# EAGLE board pcb_raspberry_pi (EAGLE 9.6.2)
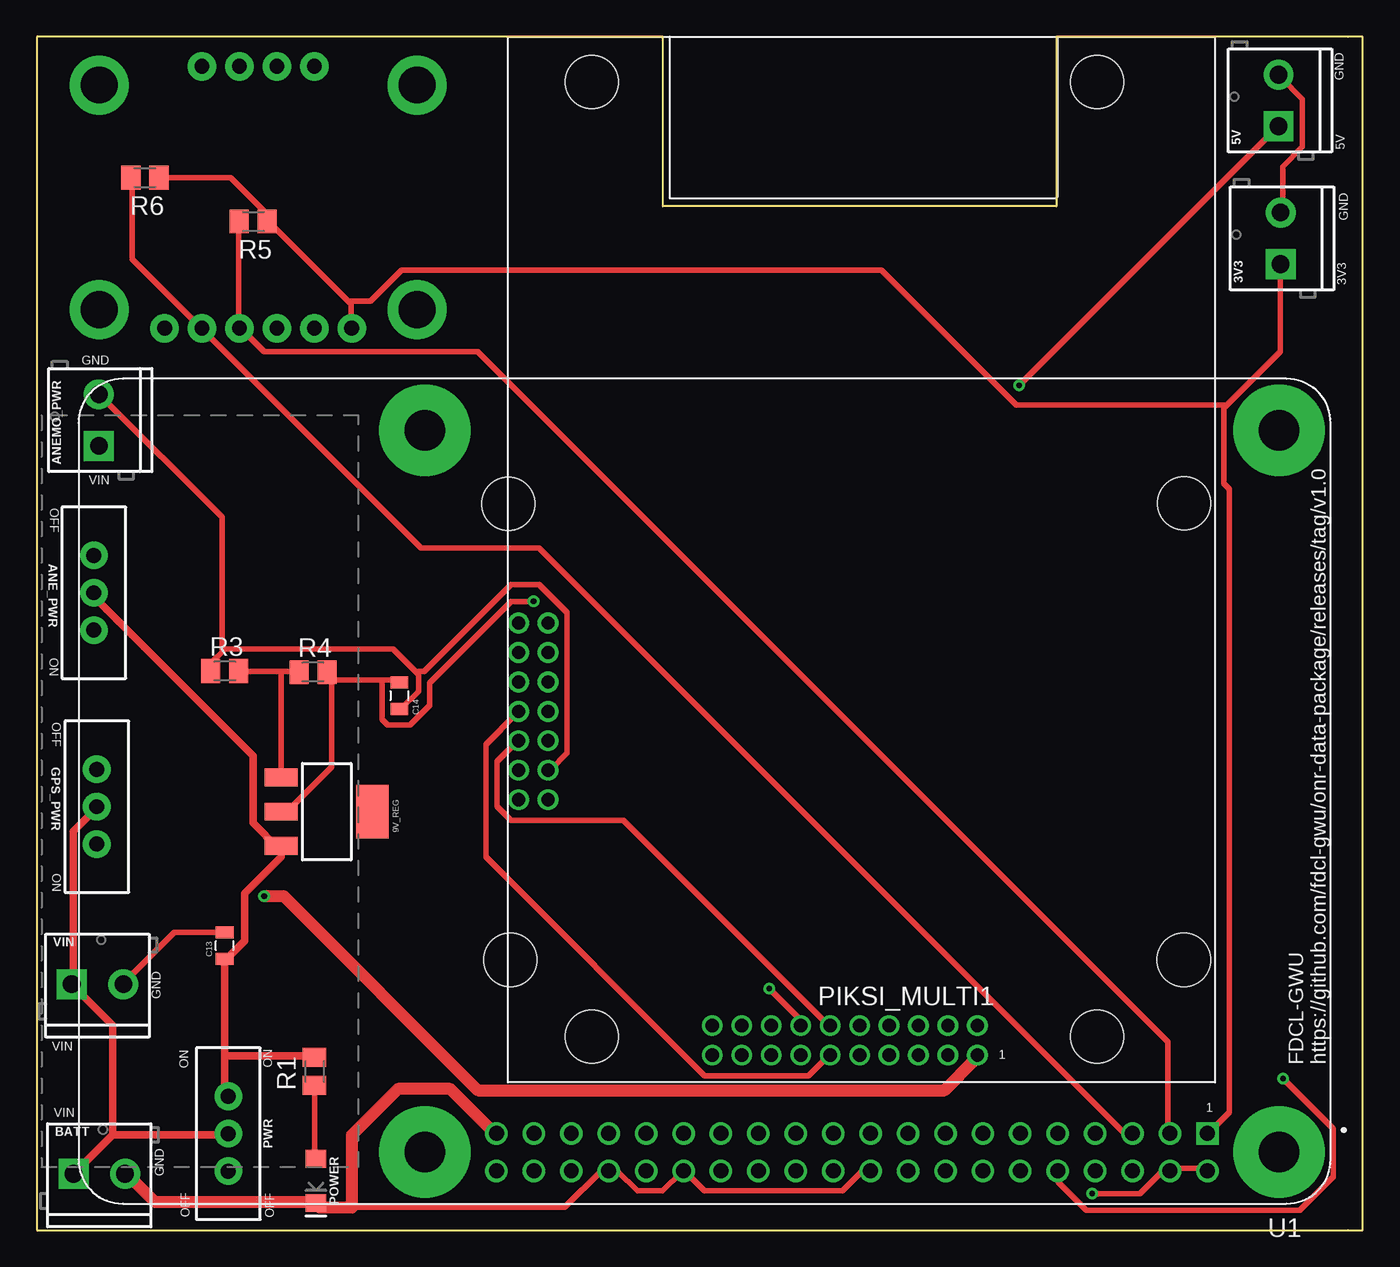
[diagram p0: board, top side]
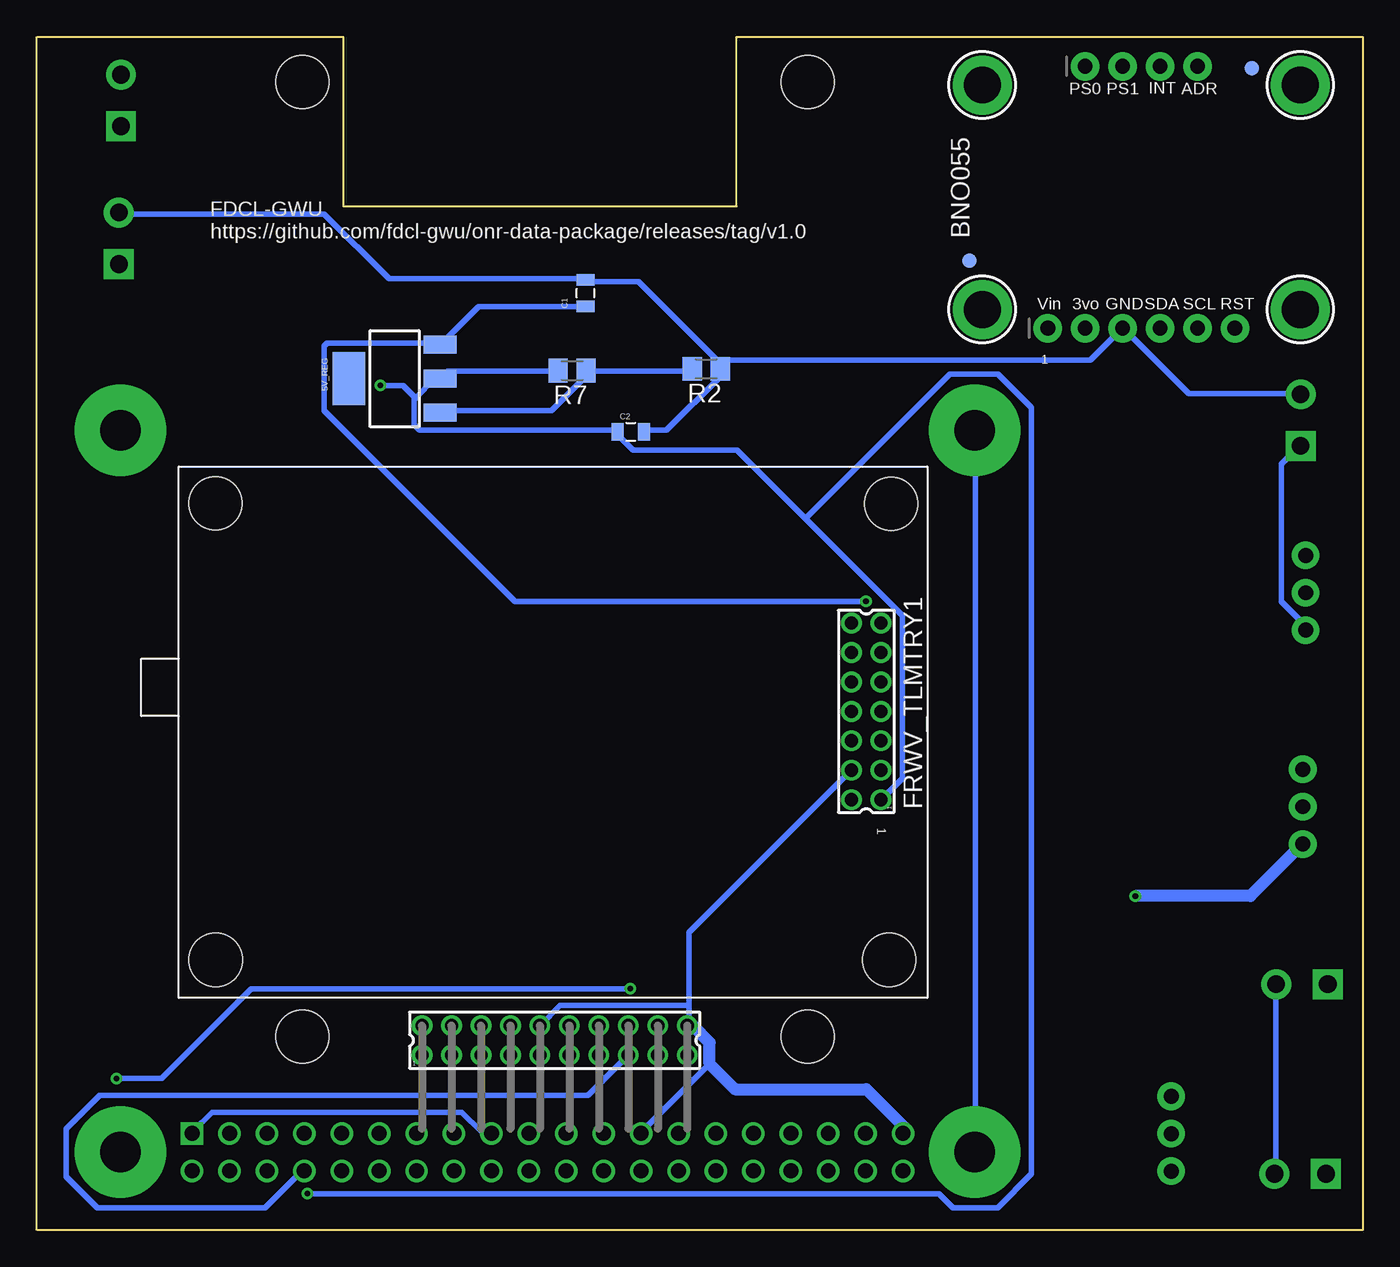
[diagram p1: board, bottom side, seen from below]

Size 90 x 81 mm. Coordinates in mm from the lower left corner, seen from the top.
Outline: 0,0 89,0 90,0 90,81 89,81 69.2,81 69.2,69.5 42.5,69.5 42.5,81 0,81 0,0
Copper layers (1*16): Top 0.035mm / dielectric 1.5mm / Bottom 0.035mm
Design rules "default": minimum track width 6mil, minimum drill 0.35mm, track to track 6mil, track to pad 6mil, pad to pad 6mil, via to via 6mil, smd to smd 6mil, copper to edge 40mil, drill to drill 6mil, minimum pad ring 10mil, minimum via ring 8mil, stop-mask expansion 4mil, vias tented up to drill 0mil, thermal gap 10mil
Net classes: 0 default: width 0.381 mm, drill 0.381 mm, clearance 0.381 mm; 1 V_IN: width 0.508 mm, drill 0.381 mm, clearance 0.381 mm
Holes 3.6 mm at 71.98,13.12 37.68,13.12 71.98,77.92 37.68,77.92 32.02,49.3 32.14,18.34 77.88,49.32 77.86,18.34

## Footprints (pad centres in the part's own frame; a part is rotated, then mirrored left to right if it is on the bottom)
SCREWTERMINAL-3.5MM-2 = drill 1.2 pad 2.032 square: 1 0,0 | drill 1.2 pad 2.032: 2 3.5,0
SOT223 = smd 1.219 x 2.235: 1 -2.311,-3.099; 2 0,-3.099; 3 2.311,-3.099 | smd 3.6 x 2.2: 4 0,3.099
SWITCH_SPDT_PTH_11.6X4.0MM = drill 1.016 pad 1.88: 1 0,2.54; 2 0,0; 3 0,-2.54
0805 = smd 0.8 x 1.2: 1 -0.9,0; 2 0.9,0
FIDUCIAL_1MM = smd 1 x 1: 1 0,0
87758-1416 = drill 0.9 pad 1.27: 1 -6,-1; 2 -6,1; 3 -4,-1; 4 -4,1; 5 -2,-1; 6 -2,1; 7 0,-1; 8 0,1; 9 2,-1; 10 2,1; 11 4,-1; 12 4,1; 13 6,-1; 14 6,1
1X06_ROUND_76 = drill 1 pad 1.93: 1 -6.35,0; 2 -3.81,0; 3 -1.27,0; 4 1.27,0; 5 3.81,0; 6 6.35,0
1X04_ROUND_76 = drill 1 pad 1.93: 1 -3.81,0; 2 -1.27,0; 3 1.27,0; 4 3.81,0
332-20 = drill 0.9 pad 1.27: 1 -9,-1; 2 -9,1; 3 -7,-1; 4 -7,1; 5 -5,-1; 6 -5,1; 7 -3,-1; 8 -3,1; 9 -1,-1; 10 -1,1; 11 1,-1; 12 1,1; 13 3,-1; 14 3,1; 15 5,-1; 16 5,1; 17 7,-1; 18 7,1; 19 9,-1; 20 9,1
LED-1206 = smd 1.2 x 1.4: A -1.5,0; C 1.5,0
M2012 = smd 1.3 x 1.6: 1 -0.95,0; 2 0.95,0
MODULE_RASPBERRY_PI_3_MODEL_B+ = drill 1.016 square: 1 -34.13,23.23 | drill 1.016: 2 -34.13,25.77; 3 -31.59,23.23; 4 -31.59,25.77; 5 -29.05,23.23; 6 -29.05,25.77; 7 -26.51,23.23; 8 -26.51,25.77; 9 -23.97,23.23; 10 -23.97,25.77; 11 -21.43,23.23; 12 -21.43,25.77; 13 -18.89,23.23; 14 -18.89,25.77; 15 -16.35,23.23; 16 -16.35,25.77; 17 -13.81,23.23; 18 -13.81,25.77; 19 -11.27,23.23; 20 -11.27,25.77; 21 -8.73,23.23; 22 -8.73,25.77; 23 -6.19,23.23; 24 -6.19,25.77; 25 -3.65,23.23; 26 -3.65,25.77; 27 -1.11,23.23; 28 -1.11,25.77; 29 1.43,23.23; 30 1.43,25.77; 31 3.97,23.23; 32 3.97,25.77; 33 6.51,23.23; 34 6.51,25.77; 35 9.05,23.23; 36 9.05,25.77; 37 11.59,23.23; 38 11.59,25.77; 39 14.13,23.23; 40 14.13,25.77 | drill 2.75 pad 6.2: S1 -39,24.5; S2 19,24.5; S3 19,-24.5; S4 -39,-24.5
MOUNTINGHOLE_2.5_PLATED_THICK = drill 2.5 pad 4: P$1 0,0

## Placement (x,y rotation side)
3V3  [SCREWTERMINAL-3.5MM-2]  84.43,65.57 90 top
5V  [SCREWTERMINAL-3.5MM-2]  84.29,74.93 90 top
5V_REG  V_REG_317SMD  [SOT223]  65.71,57.79 90 bottom
9V_REG  V_REG_317SMD  [SOT223]  19.68,28.4 270 top
ANE_PWR  [SWITCH_SPDT_PTH_11.6X4.0MM]  3.87,43.26 0 top
ANEMO_PWR  [SCREWTERMINAL-3.5MM-2]  4.21,53.23 90 top
BATT  [SCREWTERMINAL-3.5MM-2]  2.49,3.82 0 top
C1  0.1UF  [0805]  52.75,63.6 90 bottom
C2  1UF  [0805]  49.68,54.18 0 bottom
C13  0.1UF  [0805]  12.75,19.31 90 top
C14  1UF  [0805]  24.61,36.28 270 top
FID3  FIDUCIAL""  [FIDUCIAL_1MM]  7.53,78.87 0 bottom
FID4  FIDUCIAL""  [FIDUCIAL_1MM]  26.71,65.79 0 bottom
FRWV_TLMTRY1  87758-1416  [87758-1416]  33.7,35.21 90 bottom
GPS_PWR  [SWITCH_SPDT_PTH_11.6X4.0MM]  4.07,28.74 0 top
JP3  [1X06_ROUND_76]  15.03,61.22 0 bottom
JP4  [1X04_ROUND_76]  15.03,79 0 bottom
PIKSI_MULTI1  332-20  [332-20]  54.85,12.88 0 bottom
POWER  GREEN  [LED-1206]  18.95,3.34 270 top
PWR  [SWITCH_SPDT_PTH_11.6X4.0MM]  13,6.54 180 top
R1  68.1k  [M2012]  18.85,10.77 90 top
R2  750  [M2012]  44.56,58.46 180 bottom
R3  1.5k  [M2012]  12.76,37.95 0 top
R4  240  [M2012]  18.75,37.88 0 top
R5  3.3k  [M2012]  14.69,68.47 180 top
R6  2.2k  [M2012]  7.34,71.44 180 top
R7  240  [M2012]  53.66,58.34 180 bottom
U1  RASPBERRY_PI_3_MODEL_B+  [MODULE_RASPBERRY_PI_3_MODEL_B+]  45.33,29.79 180 top
U$1  MOUNTINGHOLE2.5_THICK  [MOUNTINGHOLE_2.5_PLATED_THICK]  25.82,77.73 0 bottom
U$2  MOUNTINGHOLE2.5_THICK  [MOUNTINGHOLE_2.5_PLATED_THICK]  25.82,62.49 0 bottom
U$3  MOUNTINGHOLE2.5_THICK  [MOUNTINGHOLE_2.5_PLATED_THICK]  4.23,77.73 0 bottom
U$4  MOUNTINGHOLE2.5_THICK  [MOUNTINGHOLE_2.5_PLATED_THICK]  4.23,62.49 0 bottom
VIN  [SCREWTERMINAL-3.5MM-2]  2.37,16.69 0 top

## Library data of the parts
3V3 5V ANEMO_PWR VIN = SparkFun-Connectors; PROD_ID: CONN-08399
5V_REG 9V_REG = SparkFun-PowerIC; OC_NEWARK: unknown
ANE_PWR GPS_PWR PWR = SparkFun-Switches; PROD_ID: SWCH-08261; SF_SKU: COM-00102
BATT = SparkFun-Connectors; PROD_ID: CONN-08399; SPICEPREFIX: B
C1 C2 C14 = SparkFun-Capacitors; OC_NEWARK: unknown; PROD_ID: CAP-08064
C13 = SparkFun-Capacitors; OC_NEWARK: unknown; PROD_ID: CAP-08064; SPICEPREFIX: C
FID3 FID4 U$1-U$4 = microbuilder; BOM: EXCLUDE
FRWV_TLMTRY1 = con-molex; MF: MOLEX; MPN: 87758-1416; OC_FARNELL: 7472358; OC_NEWARK: 59J1562
JP3 JP4 = microbuilder
PIKSI_MULTI1 = con-garry
POWER = SparkFun-LED; PROD_ID: DIO-00862
R1 = resistor; OC_NEWARK: unknown
R2-R4 R7 = adafruit; OC_NEWARK: unknown
R5 R6 = resistor
U1 = RASPBERRY_PI_3_MODEL_B_; AVAILABILITY: Unavailable; DESCRIPTION: RASPBERRY PI 3 MOD B+ BCM2837B0; MF: Raspberry Pi; MP: RASPBERRY PI 3 MODEL B+; PACKAGE: Raspberry Pi; PRICE: None

## Nets
+5V: 5V.1 5V_REG.2 C2.1 FRWV_TLMTRY1.1 R7.2 U1.2 U1.4
+9V: 5V_REG.3 9V_REG.2 C1.1 C14.1 R4.2
+12V [V_IN]: 9V_REG.3 ANE_PWR.2 C13.1 PWR.3 R1.2
ANE_ON: ANE_PWR.3 ANEMO_PWR.1
GND: 3V3.2 5V.2 ANEMO_PWR.2 BATT.2 C1.2 C2.2 C13.2 C14.2 FRWV_TLMTRY1.4 JP3.3 PIKSI_MULTI1.10 PIKSI_MULTI1.20 POWER.C R2.1 R3.1 U1.20 U1.25 U1.30 U1.34 U1.39 VIN.2
GPS_ON: GPS_PWR.3 PIKSI_MULTI1.1
GPS_RX0: FRWV_TLMTRY1.5 PIKSI_MULTI1.12
GPS_RX1: PIKSI_MULTI1.15 U1.8
GPS_TX0: FRWV_TLMTRY1.7 PIKSI_MULTI1.11
GPS_TX1: PIKSI_MULTI1.14 U1.10
IMU_3V3: 3V3.1 JP3.1 R5.1 R6.1 U1.1 U1.17
IMU_SCL: JP3.5 R6.2 U1.5
IMU_SDA: JP3.4 R5.2 U1.3
N$2: 9V_REG.1 R3.2 R4.1
N$3: POWER.A R1.1
N$5: 5V_REG.1 R2.2 R7.1
S$1: U1.S2 U1.S3
VIN [V_IN]: BATT.1 GPS_PWR.2 PWR.2 VIN.1

## Tracks (layer width: path | path; a pad name or v marks a point on that pad's centre or on a via)
+5V  (via drill 0.38)
  Top 0.381: U1.2 79.44,4.19 76.96,4.19 U1.4 76.77,4 76.39,4 74.87,2.48 v71.63,2.48 | v66.67,57.34 84.2,74.87 5V.1
  Bottom 0.381: 64.29,56.48 63.06,57.72 62.67,57.72 5V_REG.2 62.48,57.91 62.1,58.29 54.67,58.29 R7.2 | 64.29,56.48 64.39,56.39 64.39,54.67 64.01,54.29 50.67,54.29 C2.1 50.67,54.1 49.53,52.96 42.48,52.96 37.81,48.29 | 37.81,48.29 31.24,41.72 31.24,30.67 32.58,29.34 FRWV_TLMTRY1.1 | v71.63,2.48 28.77,2.48 27.81,1.52 24.77,1.52 22.48,3.81 22.48,55.82 24.77,58.1 28,58.1 37.81,48.29 | v66.67,57.34 65.15,57.34 64.29,56.48
+9V  (via drill 0.38)
  Top 0.381: 23.43,37.34 20.19,37.34 19.81,37.72 R4.2 20,37.34 20,31.43 17.14,28.57 16.76,28.57 9V_REG.2 | 23.43,37.34 24.57,37.34 C14.1 | v33.72,42.67 32.19,42.67 26.67,37.15 26.67,35.62 25.34,34.29 23.81,34.29 23.43,34.67 23.43,37.34
  Bottom 0.381: C1.1 52.77,62.67 60.01,62.67 62.48,60.2 5V_REG.3 62.67,60.2 70.29,60.2 70.48,60.01 70.48,55.63 57.53,42.67 v33.72,42.67
+12V
  Top 0.508: 12.76,11.81 12.76,9.34 12.95,9.14 PWR.3 | 12.76,11.81 12.76,18.29 C13.1 12.95,18.48 14.1,19.62 14.1,22.86 16.57,25.34 16.57,25.91 9V_REG.3 16.38,25.91 14.67,27.62 14.67,32.19 4,42.86 4,43.24 ANE_PWR.2 | 12.76,11.81 18.67,11.81 R1.2
ANE_ON
  Bottom 0.381: ANE_PWR.3 4,40.77 4,41.15 5.52,42.67 5.52,52.01 4.38,53.15 ANEMO_PWR.1
GND
  Top 0.381: U1.20 56.58,4 56.01,4 54.67,2.67 45.34,2.67 44.01,4 U1.30 43.81,4 42.48,2.67 40.77,2.67 39.43,4 38.86,4 U1.34 38.67,4 38.29,4 35.83,1.54 21.37,1.54 | C13.2 12.57,20.19 9.34,20.19 5.91,16.76 VIN.2 | 18.86,1.91 POWER.C 19.05,1.71 19.22,1.54 | 6.1,3.81 BATT.2 | 3V3.2 84.58,69.15 84.58,72.2 85.92,73.53 85.92,76.77 84.39,78.3 5V.2 | 25.81,37.81 24.19,39.43 12.76,39.43 12.67,39.34 | 25.81,37.81 25.91,37.72 25.91,36.58 24.77,35.43 C14.2 | 12.67,39.34 11.81,38.48 11.81,38.1 R3.1 | 12.67,39.34 12.57,39.43 12.57,48.39 4.38,56.58 ANEMO_PWR.2 | 25.81,37.81 25.91,37.91 26.29,37.91 32.19,43.81 34.1,43.81 36.01,41.91 36.01,32.38 34.86,31.24 FRWV_TLMTRY1.4 | 30.98,6.67 31.05,6.67 U1.39
  Top 0.813: 18.86,1.91 8,1.91 6.1,3.81 | 19.22,1.54 21.37,1.54 21.37,6.44 24.52,9.58 28.06,9.58 30.98,6.67
  Bottom 0.381: VIN.2 5.91,16.57 5.91,4 BATT.2 | C2.2 48.77,54.29 47.24,54.29 43.62,57.91 43.62,58.29 R2.1 | R2.1 43.62,58.48 43.62,58.86 49.15,64.39 52.58,64.39 C1.2 52.77,64.58 66.1,64.58 70.48,68.96 84.39,68.96 3V3.2 | ANEMO_PWR.2 4.38,56.77 11.81,56.77 16.19,61.15 JP3.3 16.38,61.15 18.48,59.05 43.62,59.05 R2.1 | 44.34,11.29 48.96,6.67 U1.25 | 45.72,15.24 45.72,13.91 PIKSI_MULTI1.20 | 45.72,15.24 45.72,20.19 34.86,31.05 FRWV_TLMTRY1.4 | 45.72,15.24 54.48,15.24 55.82,13.91 PIKSI_MULTI1.10
  Bottom 0.813: PIKSI_MULTI1.20 45.5,13.88 44.34,12.71 44.34,11.29 | U1.39 31.2,7.07 33.69,9.57 42.61,9.57 44.34,11.29
GPS_ON  (via drill 0.38)
  Top 0.381: 63.69,11.55 PIKSI_MULTI1.1
  Top 0.813: 63.69,11.55 61.63,9.49 29.92,9.49 16.74,22.67 v15.43,22.67
  Bottom 0.381: 4.19,26.1 GPS_PWR.3
  Bottom 0.813: v15.43,22.67 7.62,22.67 4.19,26.1
GPS_RX0
  Top 0.381: PIKSI_MULTI1.12 53.72,13.91 39.81,27.81 32.19,27.81 31.24,28.77 31.24,31.81 32.58,33.15 FRWV_TLMTRY1.5
GPS_RX1
  Bottom 0.381: PIKSI_MULTI1.15 49.91,11.81 52.58,9.14 85.72,9.14 88.01,6.86 88.01,3.62 85.92,1.52 74.49,1.52 72.01,4 U1.8
GPS_TX0
  Top 0.381: FRWV_TLMTRY1.7 32.58,35.05 30.48,32.96 30.48,25.34 45.34,10.48 52.39,10.48 53.72,11.81 PIKSI_MULTI1.11
GPS_TX1  (via drill 0.38)
  Top 0.381: v49.72,16.38 51.82,14.29 51.82,13.91 PIKSI_MULTI1.14 | v84.58,10.29 88.01,6.86 88.01,3.62 85.72,1.33 71.25,1.33 69.34,3.24 69.34,4 U1.10
  Bottom 0.381: v49.72,16.38 75.44,16.38 81.53,10.29 v84.58,10.29
IMU_3V3
  Top 0.381: R6.1 8.38,71.44 13.14,71.44 15.62,68.96 15.62,68.58 R5.1 15.81,68.39 21.24,62.96 | 21.24,62.96 21.34,62.87 21.34,61.34 JP3.1 | 80.68,55.91 80.58,55.82 80.58,50.67 80.96,50.29 80.96,8 79.63,6.67 U1.1 | 80.68,55.91 84.39,59.63 84.39,65.53 3V3.1 | 21.24,62.96 21.34,63.06 22.67,63.06 24.77,65.15 57.34,65.15 66.48,56.01 80.58,56.01 80.68,55.91
  Bottom 0.381: U1.17 59.24,6.67 59.82,6.67 61.15,8 78.11,8 79.44,6.67 U1.1
IMU_SCL
  Top 0.381: R6.2 6.48,71.44 6.48,65.91 11.05,61.34 JP3.5 11.24,61.15 26.1,46.29 34.1,46.29 73.72,6.67 74.3,6.67 U1.5
IMU_SDA
  Top 0.381: R5.2 13.72,68.39 13.72,61.34 JP3.4 13.91,61.15 15.43,59.63 29.91,59.63 76.77,12.76 76.77,6.67 U1.3
N$2
  Top 0.381: 16.57,37.91 17.72,37.91 R4.1 | 16.57,37.91 13.72,37.91 R3.2 | 16.57,37.91 16.57,30.86 9V_REG.1
N$3
  Top 0.381: POWER.A 18.86,4.95 18.86,9.72 R1.1
N$5
  Bottom 0.381: R2.2 45.53,58.29 52.58,58.29 R7.1 52.58,58.1 55.05,55.63 62.48,55.63 5V_REG.1
S$1
  Bottom 0.381: U1.S2 26.29,5.33 26.29,54.1 U1.S3
VIN
  Top 0.508: 5.14,6.48 12.95,6.48 PWR.2 | 5.14,6.48 2.67,4 BATT.1 | GPS_PWR.2 4,28.57 2.48,27.05 2.48,16.76 VIN.1 2.48,16.57 5.14,13.91 5.14,6.48

## Text on the board
tPlace: GND | GND | GND | OFF | ON | OFF | ON | GND | 1 | ON | ON | 1 | GND | OFF | OFF
bPlace: INT | ADR | PS1 | PS0 | BNO055 | RST | SCL | SDA | GND | 3vo | Vin | 1 | 1
tNames: 5V | 3V3 | VIN | VIN | FDCL-GWU / https://github.com/fdcl-gwu/onr-data-package/releases/tag/v1.0 | VIN
bNames: FDCL-GWU / https://github.com/fdcl-gwu/onr-data-package/releases/tag/v1.0